# EAGLE board LPC11UxxMini (EAGLE 6.3)
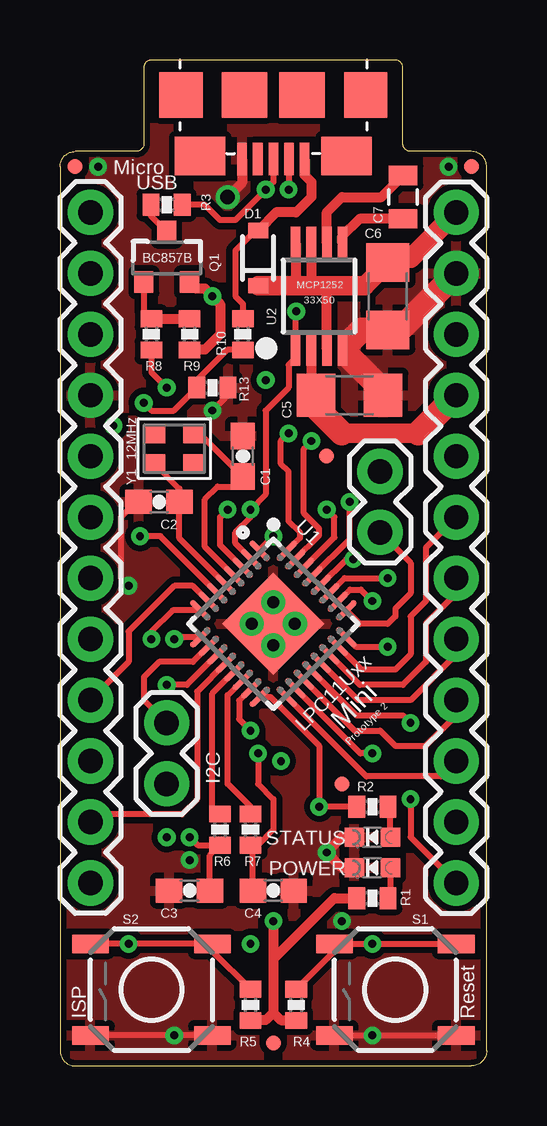
[diagram p0: board, top side]
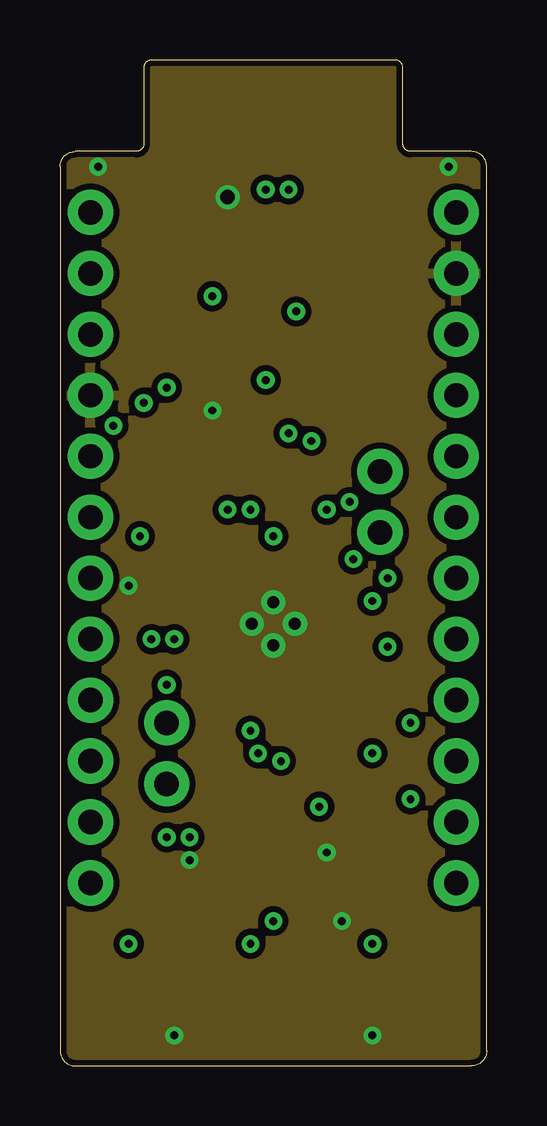
[diagram p1: board, inner layer Route2]
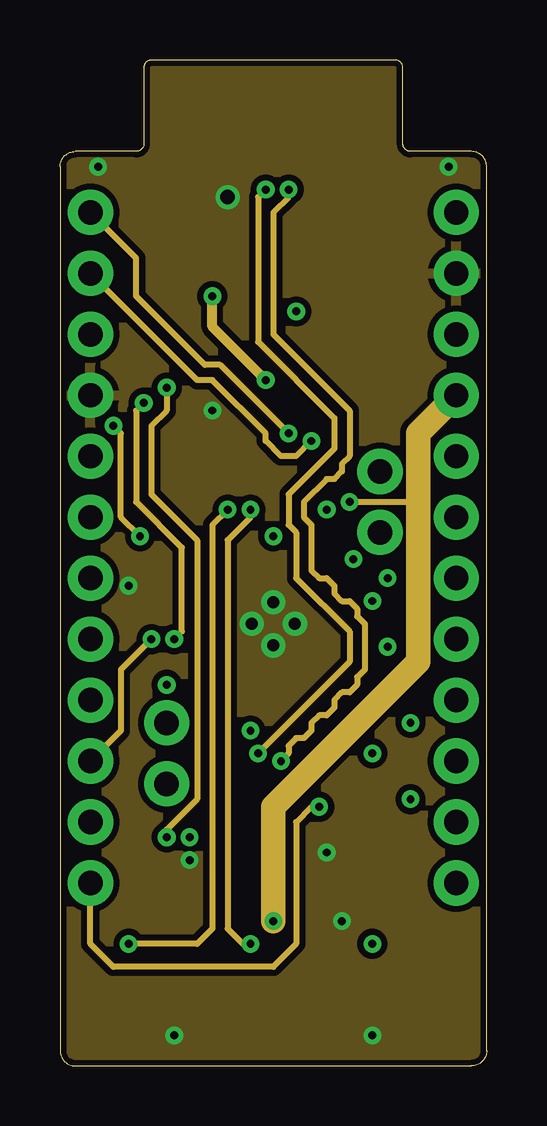
[diagram p2: board, inner layer Route3]
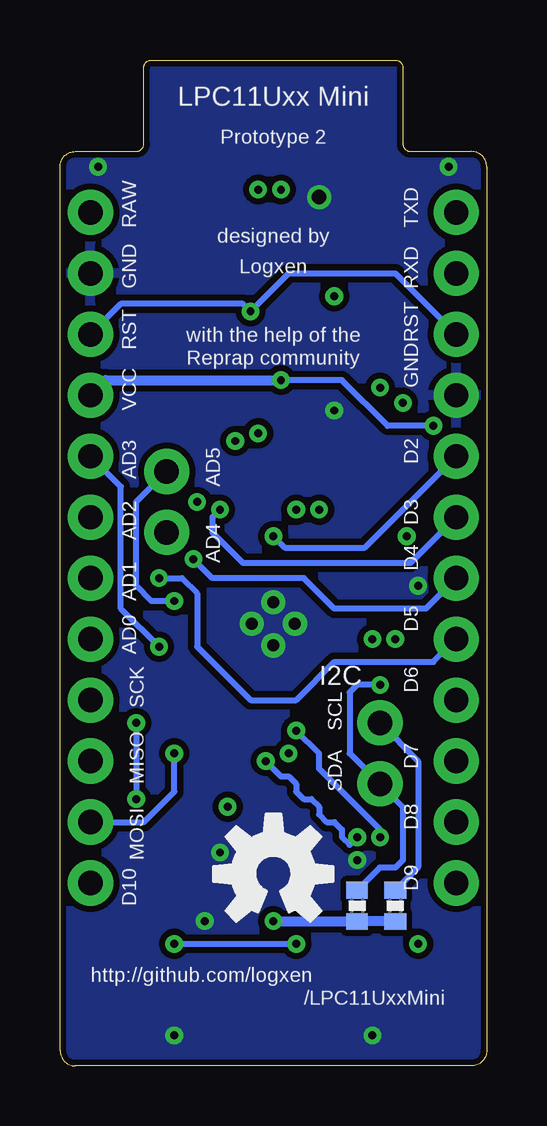
[diagram p3: board, bottom side, seen from below]

Size 17.78 x 41.91 mm. Coordinates in mm from the lower left corner, seen from the top.
Outline: 0.64,0 17.14,0 arc90 17.78,0.64 17.78,37.47 arc90 17.14,38.1 14.61,38.1 arc-90 14.29,38.42 14.29,41.59 arc90 13.97,41.91 3.81,41.91 arc90 3.49,41.59 3.49,38.42 arc-90 3.17,38.1 0.64,38.1 arc90 0,37.47 0,0.64 arc90 0.64,0
Copper layers (1*2*3*16): Top 0.035mm / dielectric 0.5mm / Route2 0.035mm / dielectric 0.5mm / Route3 0.035mm / dielectric 0.5mm / Bottom 0.035mm
Design rules "default *": minimum track width 6mil, minimum drill 13mil, track to track 8mil, track to pad 8mil, pad to pad 8mil, via to via 8mil, smd to smd 8mil, copper to edge 5mil, drill to drill 8mil, minimum pad ring 10mil, minimum via ring 8mil, stop-mask expansion 4mil, vias tented up to drill 0mil, thermal gap 10mil

## Footprints (pad centres in the part's own frame; a part is rotated, then mirrored left to right if it is on the bottom)
0603-CAP = smd 1.1 x 1: 1 -0.85,0; 2 0.85,0
1206 = smd 1.6 x 1.8: 1 -1.4,0; 2 1.4,0
0805 = smd 0.8 x 1.2: 1 -0.9,0; 2 0.9,0
SOD-323 = smd 0.63 x 0.83: 1 -1.15,0; 2 1.15,0
1X12 = drill 1.016 pad 1.88: 1 0,0; 2 2.54,0; 3 5.08,0; 4 7.62,0; 5 10.16,0; 6 12.7,0; 7 15.24,0; 8 17.78,0; 9 20.32,0; 10 22.86,0; 11 25.4,0; 12 27.94,0
MICRO-FIDUCIAL = smd 0.635 x 0.635: 1 0,0
1X02 = drill 1.016 pad 1.88: 1 0,0; 2 2.54,0
CHIPLED_0603_NOOUTLINE = smd 0.8 x 0.8: A 0,-0.75; C 0,0.75
SOT23-3 = smd 0.8 x 0.9: 1 -0.95,-1; 2 0.95,-1; 3 0,1.1
0402-RES = smd 0.7 x 0.9: 1 -0.65,0; 2 0.65,0
TACTILE_SWITCH_SMD = smd 1.524 x 0.762: 1 -2.54,1.905; 2 2.54,1.905; 3 -2.54,-1.905; 4 2.54,-1.905
HVQFN32-5X5_3MMTHERMAL = smd 1.1 x 0.25: 1 -2.55,1.75; 2 -2.55,1.25; 3 -2.55,0.75; 4 -2.55,0.25; 5 -2.55,-0.25; 6 -2.55,-0.75; 7 -2.55,-1.25; 8 -2.55,-1.75; 17 2.55,-1.75; 18 2.55,-1.25; 19 2.55,-0.75; 20 2.55,-0.25; 21 2.55,0.25; 22 2.55,0.75; 23 2.55,1.25; 24 2.55,1.75 | smd 0.25 x 1.1: 9 -1.75,-2.55; 10 -1.25,-2.55; 11 -0.75,-2.55; 12 -0.25,-2.55; 13 0.25,-2.55; 14 0.75,-2.55; 15 1.25,-2.55; 16 1.75,-2.55; 25 1.75,2.55; 26 1.25,2.55; 27 0.75,2.55; 28 0.25,2.55; 29 -0.25,2.55; 30 -0.75,2.55; 31 -1.25,2.55; 32 -1.75,2.55 | smd 3 x 3: THERMAL 0,0 | drill 0.5: THERMAL@1 -0.635,0.635; THERMAL@2 0.635,0.635; THERMAL@3 -0.635,-0.635; THERMAL@4 0.635,-0.635
MSOP8_0.65MM = smd 0.4 x 1.4: 1 -0.975,-2.2; 2 -0.325,-2.2; 3 0.325,-2.2; 4 0.975,-2.2; 5 0.975,2.2; 6 0.325,2.2; 7 -0.325,2.2; 8 -0.975,2.2
USB-MICROB-RECEPT = smd 0.4 x 1.35: 1 -1.3,4.125; 2 -0.65,4.125; 3 0,4.125; 4 0.65,4.125; 5 1.3,4.125 | smd 2.1 x 1.6: P$1 3.05,4; P$2 -3.05,4 | smd 1.8 x 1.9: P$3 -3.85,1.45; P$4 3.85,1.45 | smd 1.9 x 1.9: P$5 -1.2,1.45; P$6 1.2,1.45
CRYSTAL_2.5X2 = smd 0.9 x 0.8: 1 -0.825,-0.625; 2 0.825,-0.625; 3 0.825,0.625; 4 -0.825,0.625

## Placement (x,y rotation side)
C1  18pF  [0603-CAP]  7.62,25.4 90 top
C2  18pF  [0603-CAP]  4.13,23.5 180 top
C3  18pF  [0603-CAP]  5.4,7.3 180 top
C4  18pF  [0603-CAP]  8.89,7.3 0 top
C5  10uF  [1206]  12.06,27.94 0 top
C6  10uF  [1206]  13.65,32.07 270 top
C7  1uF  [0805]  14.29,36.2 270 top
D1  B0540WS-7  [SOD-323]  8.26,33.66 90 top
JP1  M12PTH  [1X12]  1.27,35.56 270 top
JP2  M12PTH  [1X12]  16.51,7.62 90 top
JP3  FIDUCIALUFIDUCIAL  [MICRO-FIDUCIAL]  17.14,37.47 0 top
JP4  I2C  [1X02]  4.45,11.75 90 top
JP5  ADC  [1X02]  13.34,22.23 90 top
JP6  FIDUCIALUFIDUCIAL  [MICRO-FIDUCIAL]  8.89,0.95 0 top
JP7  FIDUCIALUFIDUCIAL  [MICRO-FIDUCIAL]  11.75,11.75 0 top
JP8  FIDUCIALUFIDUCIAL  [MICRO-FIDUCIAL]  0.64,37.47 0 top
JP9  FIDUCIALUFIDUCIAL  [MICRO-FIDUCIAL]  11.11,25.4 0 top
POWER  20mA  [CHIPLED_0603_NOOUTLINE]  13.02,8.26 90 top
Q1  BC857B  [SOT23-3]  4.45,33.66 0 top
R1  330 Ohm  [0402-RES]  13.02,6.99 0 top
R2  200 Ohm  [0402-RES]  13.02,10.79 0 top
R3  1.5kOhm  [0402-RES]  4.45,35.88 0 top
R4  10kOhm  [0402-RES]  9.84,2.54 270 top
R5  10kOhm  [0402-RES]  7.94,2.54 270 top
R6  33 Ohm  [0402-RES]  6.67,9.84 90 top
R7  33 Ohm  [0402-RES]  7.94,9.84 90 top
R8  3kOhm  [0402-RES]  3.81,30.48 90 top
R9  24kOhm  [0402-RES]  5.4,30.48 270 top
R10  100 Ohm  [0402-RES]  7.62,30.48 270 top
R11  10kOhm  [0402-RES]  3.81,6.67 270 bottom
R12  10kOhm  [0402-RES]  5.4,6.67 270 bottom
R13  10kOhm  [0402-RES]  6.35,28.26 180 top
S1  Reset  [TACTILE_SWITCH_SMD]  13.97,3.17 180 top
S2  ISP  [TACTILE_SWITCH_SMD]  3.81,3.17 180 top
STATUS  20mA  [CHIPLED_0603_NOOUTLINE]  13.02,9.53 90 top
U1  LPC11Uxx  [HVQFN32-5X5_3MMTHERMAL]  8.89,18.41 315 top
U2  MCP1252-33X50I/MS  [MSOP8_0.65MM]  10.79,32.07 0 top
U$1  USB-MICROB-SMDRECEPT  [USB-MICROB-RECEPT]  8.89,41.91 180 top
U$4  [OSHW-LOGO-M]  8.89,8 0 bottom
Y1  12MHz  [CRYSTAL_2.5X2]  4.76,25.72 180 top

## Library data of the parts
C1-C7 = SparkFun-Capacitors
D1 Q1 = SparkFun-DiscreteSemi
JP1 JP2 JP4 JP5 = SparkFun-Connectors
JP3 JP6-JP9 U$4 = SparkFun-Aesthetics
POWER STATUS Y1 = microbuilder
R1-R13 = SparkFun-Resistors
S1 S2 = SparkFun-Electromechanical
U1 U2 U$1 = logxen

## Nets
AD0: JP2.5 U1.21
AD1: JP2.6 U1.22
AD2: JP2.7 U1.23
AD3: JP2.8 U1.24
AD4: JP5.1 U1.25
AD5: JP5.2 U1.26
D2: JP1.5 U1.1
D3: JP1.6 U1.30
D4: JP1.7 U1.28
D5: JP1.8 U1.27
D6: JP1.9 U1.7
D7: JP1.10 U1.8
D8: JP1.11 U1.12
D9: JP1.12 R2.1 U1.16
D10: JP2.1 U1.20
GND: C1.2 C2.2 C3.2 C4.2 C5.2 C6.2 JP1.4 JP2.11 POWER.C R13.1 S1.1 S1.2 S2.1 S2.2 STATUS.C U1.THERMAL U1.THERMAL@1 U1.THERMAL@2 U1.THERMAL@3 U1.THERMAL@4 U2.4 U$1.5
ISP: R5.1 S2.3 S2.4 U1.3
MC_USB_DM: R6.2 U1.13
MC_USB_DP: R7.2 U1.14
MC_USB_VBUS: R10.2 R13.2 U1.9
MISO: JP2.3 U1.17
MOSI: JP2.2 U1.18
POWER_LED_RESISTOR: POWER.A R1.2
PWRREG_C+: C7.1 U2.6
PWRREG_C-: C7.2 U2.5
RST: JP1.3 JP2.10 R4.1 S1.3 S1.4 U1.2 U2.1
RXD: JP1.2 U1.31
SCK: JP2.4 U1.19
SCL: JP4.2 R11.1 U1.10
SDA: JP4.1 R12.1 U1.11
STATUS_LED_RESISTOR: R2.2 STATUS.A
TXD: JP1.1 U1.32
USB_CONNECT: R8.1 U1.15
USB_CONNECT_BASE: Q1.1 R8.2 R9.1
USB_CONNECT_COLLECTOR: Q1.3 R3.1
USB_DM: C3.1 R6.1 U$1.2
USB_DP: C4.1 R3.2 R7.1 U$1.3
USB_VBUS: D1.2 R10.1 U$1.1
VCC: C5.1 JP2.9 Q1.2 R1.1 R4.2 R5.2 R9.2 R11.2 R12.2 U1.6 U1.29 U2.2
VIN: C6.1 D1.1 JP2.12 U2.3 U2.7 U2.8
XTALIN: C1.1 U1.4 Y1.1
XTALOUT: C2.1 U1.5 Y1.3

## Tracks (layer width: path | path; a pad name or v marks a point on that pad's centre or on a via)
AD0
  Top 0.254: JP2.5 16.51,17.14 14.61,15.24 12.42,15.24 U1.21
AD1
  Top 0.254: JP2.6 16.51,19.68 15.24,18.41 15.24,16.83 14.29,15.88 12.49,15.88 U1.22
AD2
  Top 0.254: JP2.7 15.24,21.59 15.24,19.37 14.61,18.73 14.61,17.14 13.97,16.51 12.56,16.51 U1.23
AD3  (via drill 0.33)
  Top 0.254: U1.24 12.32,17.46 v13.65,17.46
  Bottom 0.254: v13.65,17.46 15.24,19.05 15.24,24.13 JP2.8
AD4
  Top 0.254: 12,19.05 U1.25 12.5,18.41 13.65,18.41 13.97,18.73 13.97,19.05 14.61,19.68 14.61,20.95 JP5.1
AD5  (via drill 0.33)
  Top 0.254: U1.26 12.09,19.84 12.54,19.84 v13.02,19.37
  Bottom 0.254: v13.02,19.37 13.97,19.37 14.61,20 14.61,23.5 JP5.2
D2  (via drill 0.33)
  Top 0.254: U1.1 8.32,21.5 v8.89,22.07
  Bottom 0.254: JP1.5 5.08,21.59 8.41,21.59 v8.89,22.07
D3  (via drill 0.33)
  Top 0.254: U1.30 11.43,22.02 11.43,22.86 v11.11,23.18
  Bottom 0.254: v11.11,23.18 11.43,22.86 11.43,22.23 10.16,20.95 3.17,20.95 JP1.6
D4  (via drill 0.33)
  Top 0.254: U1.28 11.94,21.11 v12.22,21.11
  Bottom 0.254: JP1.7 2.54,19.05 6.35,19.05 7.62,20.32 11.43,20.32 v12.22,21.11
D5  (via drill 0.33)
  Top 0.254: U1.27 11.86,20.32 v13.65,20.32
  Bottom 0.254: v13.65,20.32 12.7,20.32 12.06,19.68 12.06,17.46 9.84,15.24 7.94,15.24 6.35,16.83 2.22,16.83 JP1.8
D6
  Top 0.254: U1.7 5.54,20 4.76,20 2.86,18.1 2.86,16.83 JP1.9
D7  (via drill 0.33)
  Top 0.254: U1.8 4.69,18.98 3.81,18.1 v3.81,17.78
  Route3 0.254: v3.81,17.78 2.54,16.51 2.54,13.97 JP1.10
D8
  Top 0.254: U1.12 5.71,15.59 5.71,11.11 5.08,10.48 1.59,10.48 JP1.11
D9  (via drill 0.33)
  Top 0.254: R2.1 v10.79,10.79 10.79,13.34 8.76,15.37 U1.16
  Route3 0.254: JP1.12 1.27,5.08 2.22,4.13 8.89,4.13 9.84,5.08 9.84,10.16 10.48,10.79 v10.79,10.79
D10  (via drill 0.33)
  Top 0.254: U1.20 12.35,14.61 14.29,14.61 v14.61,14.29 | v14.61,11.11 14.61,9.53 JP2.1
  Bottom 0.254: v14.61,14.29 v14.61,11.11
GND  (via drill 0.33, 0.6)
  Top 0.254: S2.1 v4.76,1.27 S2.2 | S1.2 v13.02,1.27 S1.1 | POWER.C 12.06,8.26 | C2.2 3.17,23.5 2.54,22.86 2.54,20.32 v2.86,20 | R13.1 7,27.95 v6.35,27.3
  Top 0.406: U$1.5 7.59,36.8 v6.99,36.2 | 12.06,29.53 12.06,29.57 U2.4 12.06,30.16 | STATUS.C 11.75,9.53 v11.11,8.89 11.75,8.26 POWER.C
  Top 1.016: JP2.11 14.29,30.8 13.78,30.8 C6.2 12.57,30.67 12.06,30.16 | C5.2 13.46,28.17 13.42,28.17 12.06,29.53
  other vias: 5.4,8.57 1.59,37.47 11.75,6.03 16.19,37.47
  pour Route2 (isolate 0.254): -1.27,43.18 19.05,43.18 19.05,-1.27 -1.27,-1.27
  pour Bottom (isolate 0.254): -1.27,43.18 19.05,43.18 19.05,-1.27 -1.27,-1.27
  pour Top (isolate 0.254): -1.27,43.18 19.05,43.18 19.05,-1.27 -1.27,-1.27
  pour Route3 (isolate 0.254): -1.27,43.18 19.05,43.18 19.05,-1.27 -1.27,-1.27
ISP  (via drill 0.33)
  Top 0.254: S2.4 v2.86,5.08 S2.3 6.35,4.78 R5.1 | U1.3 6.67,21.7 6.67,22.86 v6.99,23.18
  Route3 0.254: v6.99,23.18 6.35,22.54 6.35,5.71 5.71,5.08 v2.86,5.08
MC_USB_DM
  Top 0.254: R6.2 6.65,10.49 6.35,10.79 6.35,15.52 U1.13
MC_USB_DP
  Top 0.254: U1.14 6.99,15.45 6.99,11.75 7.94,10.79 7.94,10.51 7.92,10.49 R7.2
MC_USB_VBUS  (via drill 0.33)
  Top 0.254: v3.49,27.62 3.81,27.3 4.75,27.3 R13.2 5.7,28.56 6.97,29.83 R10.2 | U1.9 4.83,17.85 v4.76,17.78
  Route3 0.254: v4.76,17.78 5.08,18.1 5.08,21.59 3.17,23.5 3.17,27.3 v3.49,27.62
MISO
  Top 0.254: JP2.3 15.88,12.06 12.77,12.06 U1.17
MOSI  (via drill 0.33)
  Top 0.254: v13.02,13.02 12.52,13.02 U1.18
  Bottom 0.254: JP2.2 14.29,10.16 13.02,11.43 v13.02,13.02
POWER_LED_RESISTOR
  Top 0.254: POWER.A 13.77,7.08 R1.2
PWRREG_C+
  Top 0.406: U2.6 11.12,35.57 11.75,36.2 13.39,36.2 C7.1
PWRREG_C-
  Top 0.406: C7.2 12.48,35.3 11.77,34.59 U2.5
RST  (via drill 0.33)
  Top 0.254: v9.84,31.43 9.82,31.41 U2.1 9.82,29.5 9.53,29.21 9.53,28.26 8.57,27.3 8.57,23.81 v7.94,23.18 7.94,22.86 7.3,22.23 7.3,21.77 U1.2 | S1.3 v13.02,5.08 S1.4 11.43,4.78 R4.1
  Route3 0.254: v7.94,5.08 7.62,5.08 6.99,5.71 6.99,21.91 7.94,22.86 v7.94,23.18
  Bottom 0.254: JP2.10 15.24,31.75 10.16,31.75 v9.84,31.43 8.26,33.02 3.81,33.02 JP1.3 | v13.02,5.08 v7.94,5.08
RXD  (via drill 0.33)
  Top 0.254: U1.31 10.79,22.09 10.79,22.38 10.16,23.02 10.16,25.72 v10.48,26.04
  Route3 0.254: v10.48,26.04 9.84,25.4 9.21,25.4 8.57,26.04 8.57,26.35 6.35,28.57 5.71,28.57 JP1.2
SCK
  Top 0.254: U1.19 12.27,13.97 13.34,13.97 13.97,13.34 15.24,13.34 16.51,14.61 JP2.4
SCL
  Top 0.254: U1.10 5.54,16.83 4.13,16.83 3.49,16.19 3.49,15.24 JP4.2
  Bottom 0.254: JP4.2 2.86,12.7 2.86,8.27 R11.1
SDA  (via drill 0.33)
  Top 0.254: U1.11 5.29,15.88 v4.45,15.88
  Bottom 0.254: R12.1 4.46,8.26 3.81,8.26 3.49,8.57 3.49,10.79 JP4.1 5.71,13.02 5.71,15.56 5.4,15.88 v4.45,15.88
STATUS_LED_RESISTOR
  Top 0.254: STATUS.A 13.77,10.7 R2.2
TXD  (via drill 0.33)
  Top 0.254: v9.53,26.35 9.21,26.04 9.21,25.08 9.53,24.77 9.53,22.7 10,22.23 10,22 U1.32
  Route3 0.254: JP1.1 3.17,33.66 3.17,32.07 6.03,29.21 6.67,29.21 v9.53,26.35
USB_CONNECT  (via drill 0.33)
  Top 0.254: U1.15 7.46,15.22 7.46,14.45 v7.94,13.97 | R8.1 3.81,28.89 v4.45,28.26
  Route3 0.254: v4.45,28.26 4.45,27.3 3.81,26.67 3.81,23.81 5.71,21.91 5.71,11.11 4.45,9.84 v4.45,9.53
  Bottom 0.254: v4.45,9.53 4.45,9.84 6.99,12.38 6.99,13.02 v7.94,13.97
USB_CONNECT_BASE
  Top 0.254: Q1.1 3.5,31.45 R8.2
  Top 0.406: R8.2 R9.1
USB_CONNECT_COLLECTOR
  Top 0.254: Q1.3 3.79,35.41 R3.1
USB_DM  (via drill 0.33)
  Top 0.254: U$1.2 9.54,36.53 v9.53,36.51 | C3.1 6.25,8.77 R6.1 5.73,9.19 v5.4,9.53
  Route3 0.254: v9.53,36.51 9.53,36.2 8.89,35.56 8.89,30.48 12.06,27.3 12.06,25.4 11.75,25.08 11.75,24.77 11.43,24.45 11.11,24.45 10.16,23.5 10.16,22.86 10.48,22.54 10.48,20.64 10.79,20.32 11.11,20.32 11.43,20 11.43,19.68 11.75,19.37 12.06,19.37 12.38,19.05 12.38,18.73 12.7,18.41 12.7,16.51 12.38,16.19 12.38,15.88 12.06,15.56 11.75,15.56 11.43,15.24 11.43,14.92 11.11,14.61 10.79,14.61 10.48,14.29 10.48,13.97 10.16,13.65 9.84,13.65 9.53,13.34 9.53,13.02 v9.21,12.7
  Bottom 0.254: v9.21,12.7 8.57,12.06 8.26,12.06 7.94,11.75 7.94,11.43 7.62,11.11 7.3,11.11 6.99,10.79 6.99,10.48 6.67,10.16 6.35,10.16 6.03,9.84 6.03,9.53 5.71,9.21 v5.4,9.53
USB_DP  (via drill 0.33)
  Top 0.254: U$1.3 8.89,36.83 v8.57,36.51 7.3,35.24 6.67,35.24 6.03,35.88 R3.2 | C4.1 8.04,9.09 R7.1 8.26,9.19 8.89,9.83 8.89,11.11 8.26,11.75 v8.26,13.02
  Route3 0.254: v8.57,36.51 8.26,36.2 8.26,30.16 11.43,26.99 11.43,25.72 9.53,23.81 9.53,22.54 9.84,22.23 9.84,20.32 12.06,18.1 12.06,16.83 v8.26,13.02
USB_VBUS
  Top 0.254: D1.2 8.13,34.8 7.3,33.97 7.3,32.07 7.62,31.75 R10.1
  Top 0.406: U$1.1 10.19,37.12 10.48,36.83 10.48,36.2 9.84,35.56 9.01,35.56 D1.2
VCC  (via drill 0.33)
  Top 0.254: U1.29 12.06,21.94 v12.06,23.5 | U1.6 4.18,22.07 v3.33,22.07
  Top 0.406: U2.2 10.47,28.14 C5.1 | R9.2 5.41,29.84 6.03,29.84 6.67,30.48 6.67,31.75 v6.35,32.07 6.03,32.38 5.67,32.38 Q1.2 | R1.1 11.43,6.99 8.89,4.45 v8.89,6.03 8.89,2.22 | 8.27,1.89 R5.2 7.95,1.91 8.57,1.91 8.89,2.22 | 9.51,1.89 R4.2 9.83,1.91 9.21,1.91 8.89,2.22
  Top 0.813: 14.92,26.35 11.75,26.35
  Top 1.016: JP2.9 14.92,26.35 | C5.1 10.66,27.43 11.75,26.35
  Route3 0.254: v12.06,23.5 14.61,23.5 14.92,23.81 | v3.33,22.07 2.54,22.86 2.54,26.35 v2.22,26.67
  Route3 0.406: v8.57,28.57 6.35,30.8 v6.35,32.07
  Route3 1.016: v8.89,6.03 8.89,10.79 14.92,16.83 14.92,23.81 14.92,26.35 JP2.9
  Bottom 0.254: v2.22,26.67 4.13,26.67 6.03,28.57 v8.57,28.57
  Bottom 0.406: R11.2 R12.2 5.41,6.03 v8.89,6.03 | v8.57,28.57 15.88,28.57 JP2.9
VIN
  Top 0.406: 13.84,33.66 C6.1 | U2.7 10.47,32.81 10.16,32.51 | U2.8 9.82,32.8 9.53,32.51 | U2.3 11.12,32.18 10.79,32.51
  Top 0.813: JP2.12 14.61,33.66 13.84,33.66 | D1.1 9.53,32.51 10.16,32.51 10.79,32.51 12.69,32.51 C6.1
XTALIN
  Top 0.254: U1.4 6.03,21.63 6.03,23.6 6.57,24.13 7.2,24.13 C1.1 5.83,26.34 Y1.1
XTALOUT
  Top 0.254: U1.5 4.98,21.97 C2.1 4.98,24.05 Y1.3

## Text on the board
tPlace: Micro | MCP1252 | 33X50 | LPC11Uxx | Mini | Prototype 2
bPlace: LPC11Uxx Mini | Prototype 2 | TXD | RAW | designed by | RXD | GND | RST | with the help of the | RST | Reprap community | GND | VCC | D2 | AD5 | AD3 | D3 | AD2 | D4 | AD4 | AD1 | D5 | AD0 | D6 | SCK | SCL | D7 | MISO | SDA | D8 | MOSI | D9 | D10 | http://github.com/logxen
tNames: USB
bNames: Logxen | I2C | /LPC11UxxMini